# EAGLE board CircuitRiver - Breakout-LiPo Spring (EAGLE 7.5.0)
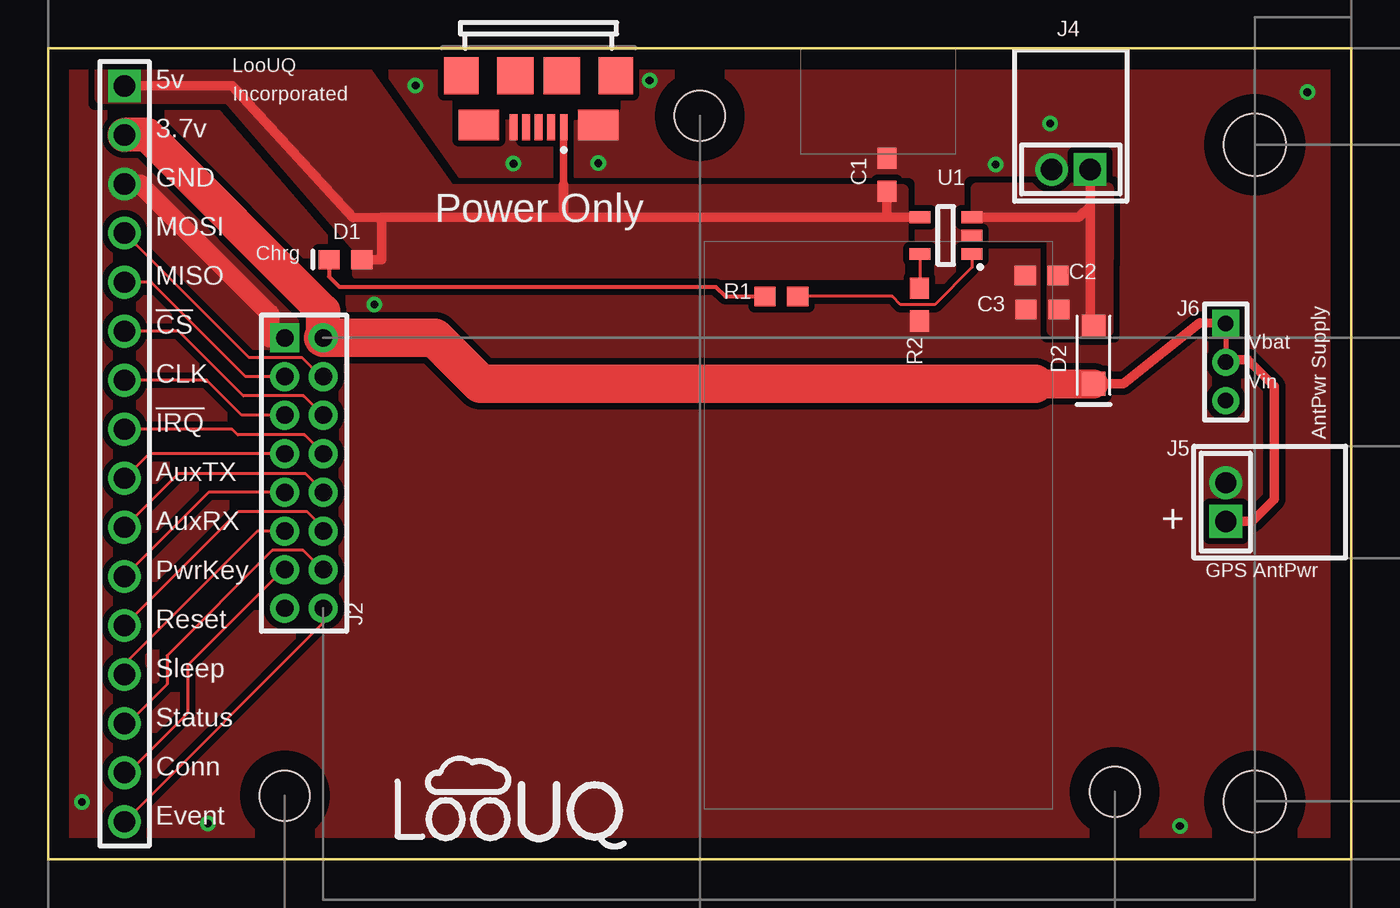
[diagram p0: board, top side]
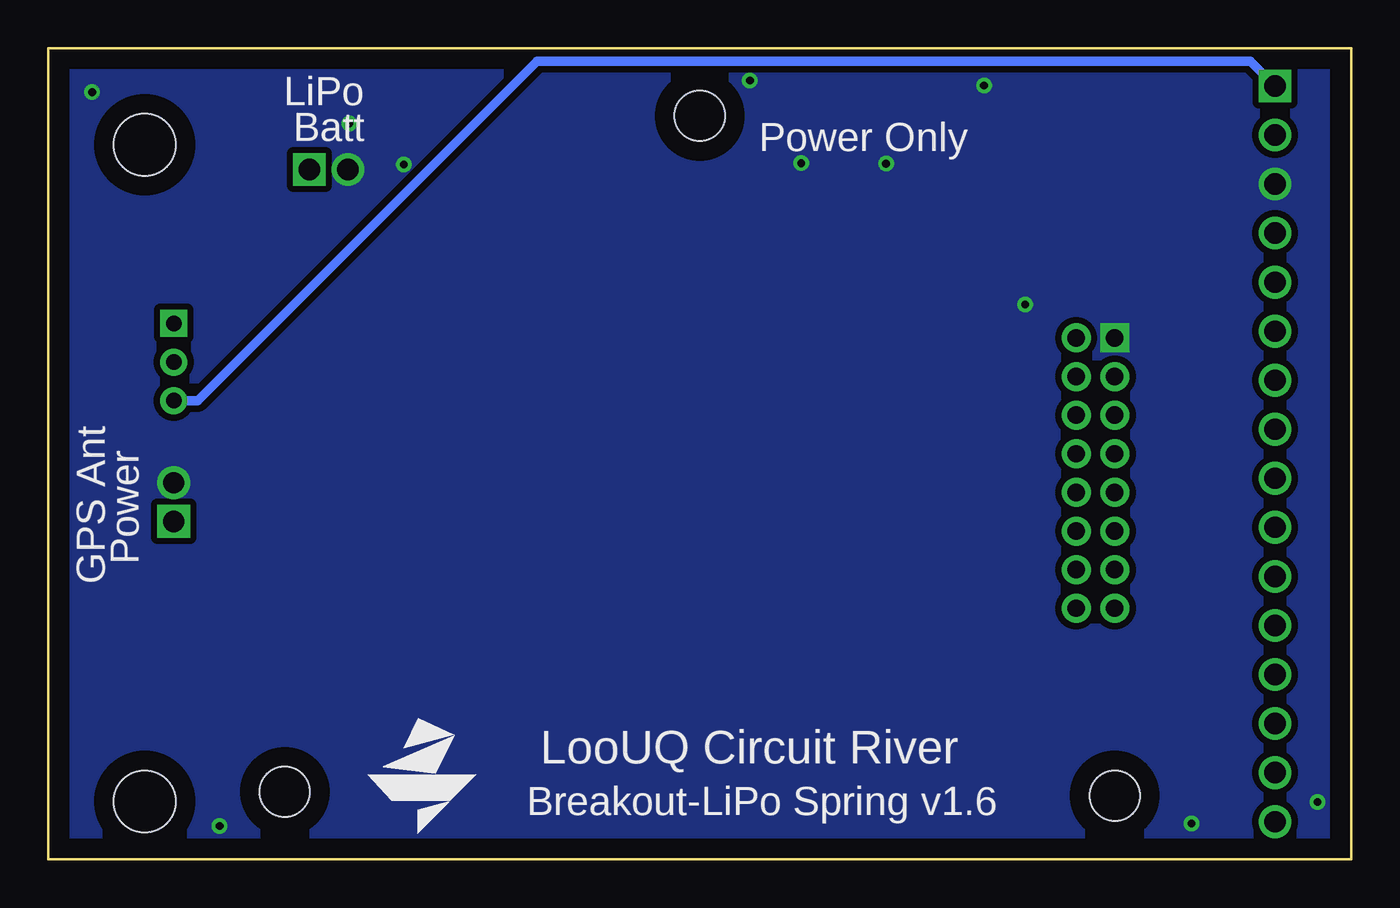
[diagram p1: board, bottom side, seen from below]

Size 67.5 x 42 mm. Coordinates in mm from the lower left corner, seen from the top.
Outline: 0,0 0,42 67.5,42 67.5,0 0,0
Copper layers (1*16): Top 0.035mm / dielectric 1.5mm / Bottom 0.035mm
Design rules "default *": minimum track width 10mil, minimum drill 0.61mm, track to track 8mil, track to pad 8mil, pad to pad 8mil, via to via 8mil, smd to smd 8mil, copper to edge 40mil, drill to drill 8mil, minimum pad ring 0mil, minimum via ring 8mil, stop-mask expansion 4mil, vias tented up to drill 16mil, thermal gap 10mil
Net classes: 0 Default: width 0.15 mm, clearance 0.2 mm, clearance 0.2 mm to class 1; 1 Power: width 0.5 mm, clearance 0.2 mm, clearance 0.2 mm to class 0
Holes 3.2 mm at 62.5,37 62.5,3
Holes 2.6 mm at 12.25,3.3 33.75,38.5 55.25,3.5

## Footprints (pad centres in the part's own frame; a part is rotated, then mirrored left to right if it is on the bottom)
CAP_0603 = smd 1.1 x 1: 1 -0.85,0; 2 0.85,0
LED_0603 = smd 1.1 x 1: 1 -0.85,0; 2 0.85,0
SOD-123FL_Diode = smd 1.25 x 1.22: 1 -1.475,0; 2 1.475,0
HDR-1x16T/2.54 = drill 1.1 pad 1.7 square: 1 -19.05,0 | drill 1.1 pad 1.7: 2 -16.51,0; 3 -13.97,0; 4 -11.43,0; 5 -8.89,0; 6 -6.35,0; 7 -3.81,0; 8 -1.27,0; 9 1.27,0; 10 3.81,0; 11 6.35,0; 12 8.89,0; 13 11.43,0; 14 13.97,0; 15 16.51,0; 16 19.05,0
HDR-2x8T/2x2/16x4 = drill 0.9 pad 1.5 square: 1 -7,-1 | drill 0.9 pad 1.5: 2 -7,1; 3 -5,-1; 4 -5,1; 5 -3,-1; 6 -3,1; 7 -1,-1; 8 -1,1; 9 1,-1; 10 1,1; 11 3,-1; 12 3,1; 13 5,-1; 14 5,1; 15 7,-1; 16 7,1
ZX62-B-5P = smd 0.4 x 1.35: 1 -1.3,1.475; 2 -0.65,1.475; 3 0,1.475; 4 0.65,1.475; 5 1.3,1.475 | smd 2.1 x 1.6: 6 -3.1,1.35; 7 3.1,1.35 | smd 1.8 x 1.9: 8 -4,-1.2; 9 4,-1.2 | smd 1.9 x 1.9: 10 -1.2,-1.2; 11 1.2,-1.2
JST_PH-2_T/H = drill 1.1 pad 1.7 square: 1 0,-1 | drill 1.1 pad 1.7: 2 0,1
JST_PH-2_T/H_J5 = drill 1.1 pad 1.7 square: 1 0,-1 | drill 1.1 pad 1.7: 2 0,1
HDR-1x3T/2/6x2 = drill 0.8 pad 1.4 square: 1 -2,0 | drill 0.8 pad 1.4: 2 0,0; 3 2,0
RES_0603 = smd 1.1 x 1: 1 -0.85,0; 2 0.85,0
SOT23-5 = smd 1.1 x 0.6: 1 -1.35,0.95; 2 -1.35,0; 3 -1.35,-0.95; 4 1.35,-0.95; 5 1.35,0.95

## Placement (x,y rotation side)
C1  4.7uF  [CAP_0603]  43.45,35.45 90 top
C2  4.7uF  [CAP_0603]  51.45,30.23 180 top
C3  10pF  [CAP_0603]  51.5,28.48 0 top
D1  Green  [LED_0603]  15.4,31.05 0 top
D2  SCHOTTKY RECT - 2A60V  [SOD-123FL_Diode]  54.15,26.1 90 top
J1  DoNotMount  [HDR-1x16T/2.54]  3.95,21 270 top
J2  HA-CTA HEADER  [HDR-2x8T/2x2/16x4]  13.25,20 270 top
J3  USB JACK  [ZX62-B-5P]  25.4,39.38 180 top
J4  JST PH-2 T/H  [JST_PH-2_T/H]  52.98,35.73 90 top
J5  JST PH-2 T/H  [JST_PH-2_T/H_J5]  61,18.5 0 top
J6  DNF  [HDR-1x3T/2/6x2]  61,25.75 270 top
LG1  LOOUQ LOGO  [LooUQ-6mm]  23.95,2.89 0 top
LG2  CIRCUITRIVER LOGO  [CircuitRiver-6mm]  48.15,4.33 0 bottom
R1  470R  [RES_0603]  37.98,29.15 0 top
R2  2K  [RES_0603]  45.12,28.73 90 top
U1  MCP73831-2ACI/OT  [SOT23-5]  46.5,32.3 180 top

## Library data of the parts
C1 C2 = common; MANUFACTURER: Samsung; MFGPARTNM: CL10A475KQ8NNNC
C3 = common; DESCRIPTION: CAP CER 10PF 50V C0G 0402; MANUFACTURER: TDK; MFGPARTNM: CGA2B2C0G1H100D050BA
D1 = common; MANUFACTURER: Lite-On; MFGPARTNM: LTST-C190GKT
D2 = common; DATASHEET: https://www.onsemi.com/pub/Collateral/NTS260ESF-D.PDF; DESCRIPTION: DIODE SCHOTTKY 60V 2A SOD123FL; MANUFACTURER: On Semiconductor; MFGPARTNM: NRVTS260ESFT1G
J1 = common; DATASHEET: http://datasheets.diptrace.com/con_headers/ENG_CD_644456_D2.pdf; MANUFACTURER: TE Connectivity
J2 = common; DATASHEET: https://cdn.harwin.com/pdfs/M22-204.pdf; MANUFACTURER: Harwin; MFGPARTNM: M22-2040805
J3 = common; DATASHEET: http://datasheets.diptrace.com/con_usb/ZX62-B-5P.pdf; MANUFACTURER: Hirose; MFGPARTNM: ZX62-B-5PA(33)
J4 J5 = common; DATASHEET: https://media.digikey.com/pdf/Data%20Sheets/3M%20PDFs/951yyy-xx22-AR_Series%20Datasheet.pdf; MANUFACTURER: JST; MFGPARTNM: 951102-8622-AR
J6 = common; DATASHEET: https://media.digikey.com/pdf/Data%20Sheets/3M%20PDFs/951yyy-xx22-AR_Series%20Datasheet.pdf; MANUFACTURER: 3M; MFGPARTNM: 951103-8622-AR
LG1 LG2 = common
R1 = common; MANUFACTURER: Yageo; MFGPARTNM: RC0603FR-07470RL
R2 = common; MANUFACTURER: Susumu; MFGPARTNM: RR0816P-202-D
U1 = common; DESCRIPTION: IC CONTROLLR LI-ION 4.2V SOT23-5; MANUFACTURER: On Semiconductor; MFGPARTNM: MCP73831T-2ACI/OT

## Nets
Net_0 [Power]: C1.1 D1.2 J1.1 J3.1 J6.3 U1.4
Net_1 [Power]: D2.1 J1.2 J2.2 J5.1 J6.1 J6.2
Net_3: J1.16 J2.16
Net_4: J1.15 J2.13
Net_5: J1.14 J2.14
Net_6: J1.13 J2.11
Net_7: J1.12 J2.12
Net_8: J1.11 J2.9
Net_9: J1.10 J2.10
Net_10: J1.9 J2.7
Net_11: J1.8 J2.8
Net_12: J1.7 J2.5
Net_13: J1.6 J2.6
Net_14: J1.5 J2.3
Net_15: J1.4 J2.4
Net_16 [Power]: C2.1 C3.2 D2.2 J4.1 U1.3
Net_17: R1.2 U1.1
Net_20: R2.2 U1.5
Net_22: D1.1 R1.1
Net_GND [Power]: C1.2 C2.2 C3.1 J1.3 J2.1 J3.5 J3.6 J4.2 J5.2 R2.1 U1.2

## Tracks (layer width: path | path; a pad name or v marks a point on that pad's centre or on a via)
Net_0
  Top 0.4: J3.1 26.7,34.95
  Top 0.5: J1.1 9.53,40.05 15.8,33.23 17.27,33.25 | 17.27,33.25 26.7,33.25 | 26.7,33.25 43.45,33.25 | 43.45,33.25 U1.4 | 26.7,34.95 26.7,33.25 | D1.2 17.27,31.05 17.27,33.25 | C1.1 43.45,33.25
  Bottom 0.5: J1.1 5.22,41.33 42.17,41.33 59.75,23.75 J6.3
  pour Top (isolate 0.33, rank 2, no thermals): 2.72,41.23 2.72,39.44 9.35,39.44 16.04,31.69 16.04,30.32 44.26,30.32 44.26,34.66 20.76,34.68 16.14,41.23
Net_1
  Top 0.25: J6.1 J6.2
  Top 0.5: D2.1 55.69,24.62 59.65,27.77 J6.1 | J6.2 61.12,25.88 62.15,25.88 63.52,24.5 63.52,18.65 62.38,17.5 J5.1
  Top 1.5: 51.12,24.62 D2.1
  Top 1.75: J2.2 14.25,28.39 5.13,37.51 J1.2
  Top 2: J2.2 20.02,27 22.4,24.62 51.12,24.62
Net_3
  Top 0.15: J2.16 14.25,12.25 J1.16
Net_4
  Top 0.15: J2.13 12.18,15 7.22,10.05 7.22,7.58 4.14,4.49 J1.15
Net_5
  Top 0.15: J2.14 14.2,15 13.2,16 11.6,16 6.15,10.55 6.15,9.07 4.11,7.03 J1.14
Net_6
  Top 0.15: J2.11 10.82,17 3.95,10.12 J1.13
Net_7
  Top 0.15: J2.12 14.25,17.15 13.4,18 9.84,18 J1.12
Net_8
  Top 0.15: J2.9 8.3,19 J1.11
Net_9
  Top 0.15: J2.10 14.25,19.05 13.32,19.98 6.74,19.98 J1.10
Net_10
  Top 0.15: J2.7 5.22,21 J1.9
Net_11
  Top 0.15: J2.8 13.28,21.98 9.82,21.98 9.53,22.27 J1.8
Net_12
  Top 0.15: J2.5 10.03,23 8.21,24.81 J1.7
Net_13
  Top 0.15: J2.6 14.22,23 13.22,24 10.1,24 6.75,27.35 J1.6
Net_14
  Top 0.15: J2.3 10.22,25 5.33,29.89 J1.5
Net_15
  Top 0.15: J2.4 14.12,25 13.15,25.98 10.4,25.98 J1.4
Net_16
  Top 0.5: D2.2 53.98,27.75 J4.1 53.98,33.83 53.4,33.25 U1.3
  pour Top (isolate 0.33, no thermals): 48.12,34.73 48.12,32.27 51.73,32.27 51.85,32.24 51.95,32.17 52.02,32.07 52.04,31.95 52.04,27.39 54.86,27.37 54.88,34.73
Net_17
  Top 0.15: U1.1 47.85,30.65 45.92,28.73 44.15,28.73 43.73,29.15 R1.2
Net_20
  Top 0.15: U1.5 45.15,29.6 R2.2
Net_22
  Top 0.2: D1.1 14.55,30.18 15.07,29.65 34.58,29.65 35.08,29.15 R1.1
Net_GND  (via drill 0.4 pad 0.8)
  Top 0.5: J2.1 11.47,27
  Top 1: 11.47,27 11.47,28.25 4.75,34.97 J1.3
  other vias: 19.02,40.08 24.1,36.02 31.15,40.33 28.5,36.05 16.9,28.73 49.08,35.98 1.75,2.98 8.28,1.85 58.62,1.73 65.22,39.73 51.9,38.1
  pour Bottom (isolate 0.33, rank 9, no thermals): 0.77,41.23 0.77,0.77 66.73,0.77 66.73,41.23
  pour Top (isolate 0.33, rank 9): 0.77,41.23 0.77,0.77 66.68,0.77 66.68,41.23

## Text on the board
tPlace: 5v | LooUQ | Incorporated | 3.7v | GND | Power Only | MOSI | Chrg | MISO | !CS | Vbat | CLK | Vin | !IRQ | AntPwr Supply | AuxTX | AuxRX | + | PwrKey | GPS AntPwr | Reset | Sleep | Status | Conn | Event
bPlace: LiPo | Batt | Power Only | GPS Ant | Power | LooUQ Circuit River | Breakout-LiPo Spring v1.6
tDocu: LTEm1 USB | LTEm1 SIM